# EAGLE board basic (EAGLE 9.5.2)
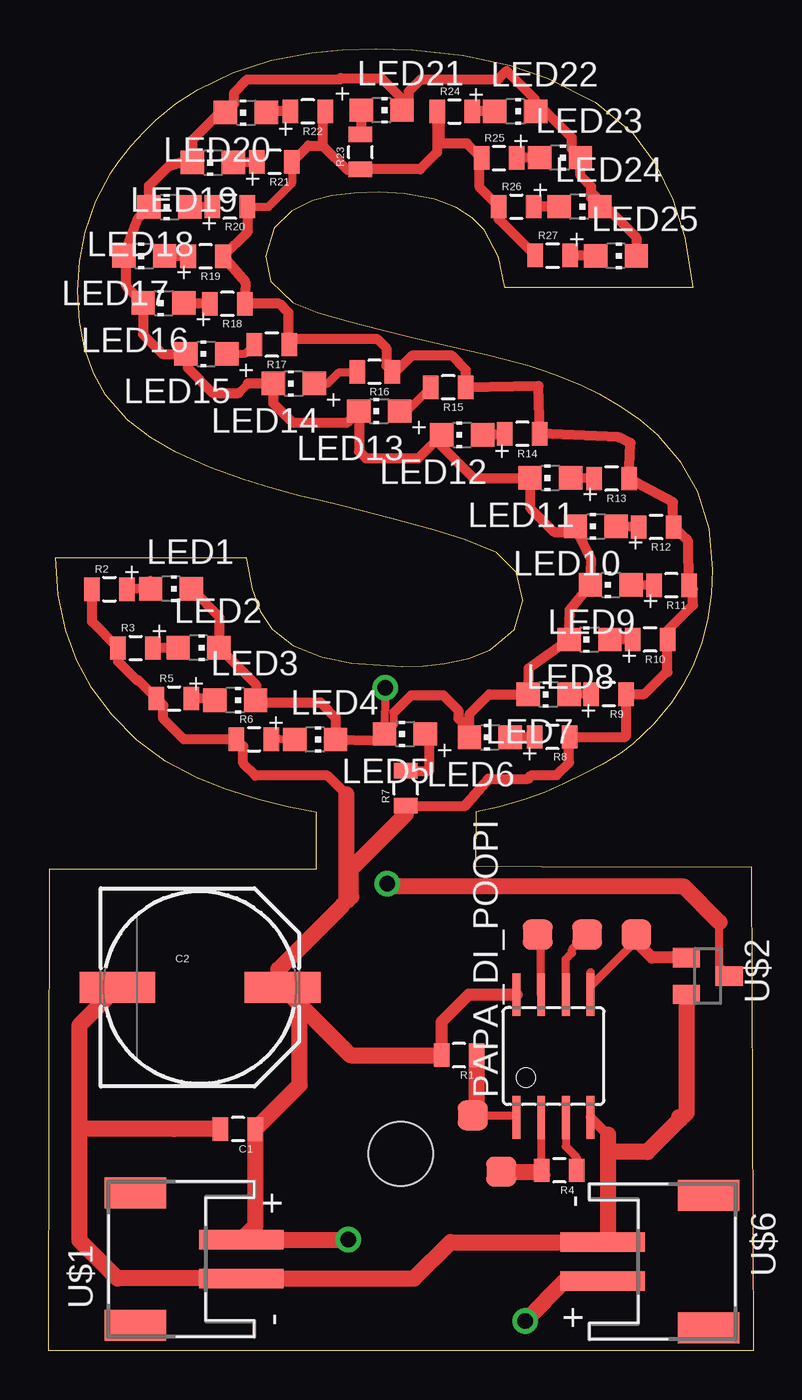
[diagram p0: board, top side]
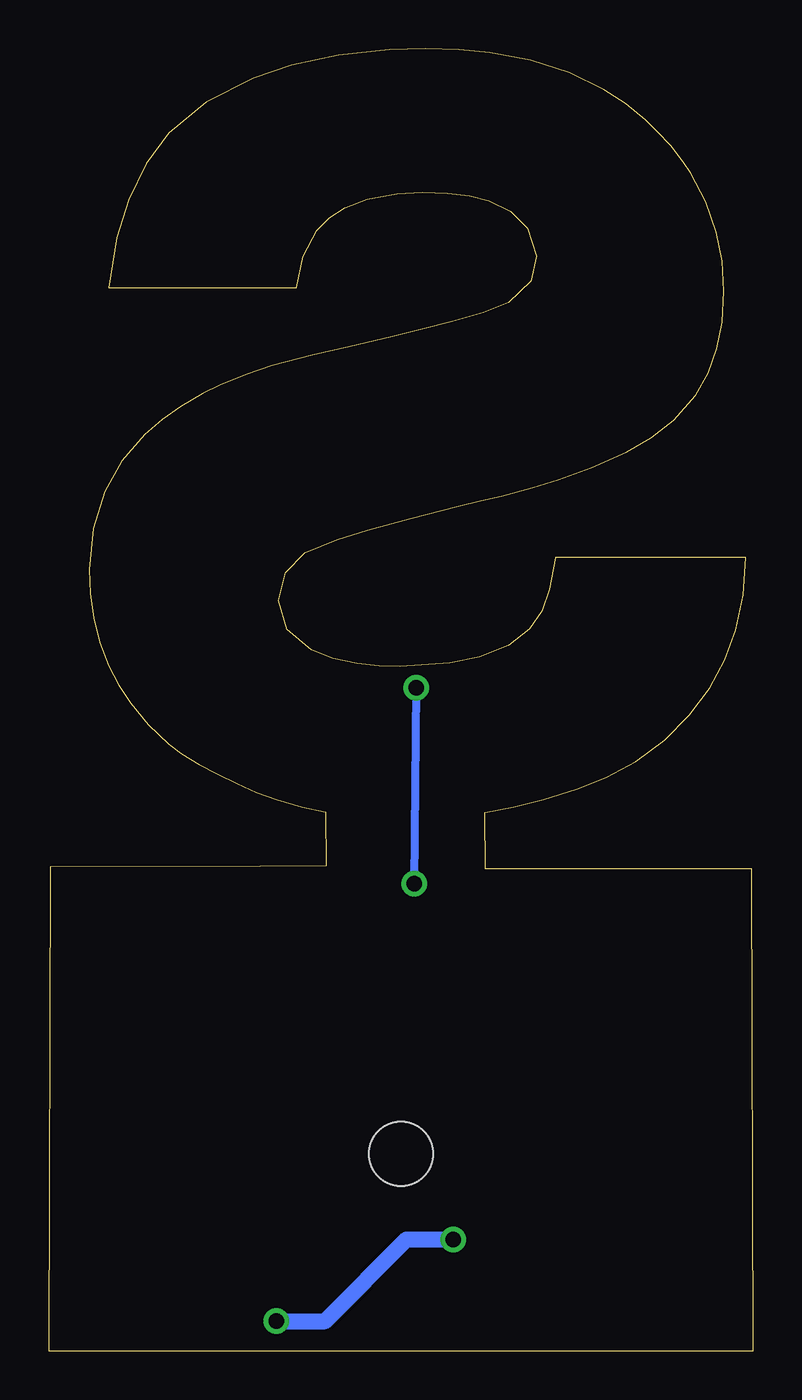
[diagram p1: board, bottom side, seen from below]

Size 36.27 x 67.02 mm. Coordinates in mm from the lower left corner, seen from the top.
Outline: 13.8,27.72 12.34,27.99 10.79,28.38 9.07,28.93 7.59,29.51 6.02,30.34 4.54,31.45 3.28,32.72 2.23,34.13 1.45,35.57 0.88,37.1 0.51,38.9 0.38,40.82 10.18,40.82 10.48,39.21 10.88,38.09 11.5,37.16 12.6,36.31 14.08,35.71 15.6,35.39 18.18,35.23 19.27,35.26 20.38,35.38 21.61,35.64 22.73,36.07 23.99,37.13 24.41,38.62 24.07,40.05 23.05,41.09 21.42,41.76 19.85,42.24 17.66,42.84 15.16,43.47 14.01,43.75 12.95,44.01 11.37,44.43 10.03,44.83 8.33,45.45 6.53,46.26 5.25,47 4.07,47.9 2.95,49.18 2.31,50.31 1.86,51.58 1.59,52.95 1.5,54.55 1.59,56.08 1.88,57.58 2.43,59.13 3.21,60.61 3.59,61.19 4.24,62.02 4.92,62.76 5.52,63.34 6.55,64.19 7.68,64.92 9.47,65.78 11.46,66.42 13.53,66.81 15.15,66.97 16.85,67.02 18.7,66.97 21.34,66.69 23.75,66.17 25.71,65.51 28.15,64.26 30.07,62.66 31.24,61.1 32.14,59.26 32.75,57.29 33.16,54.72 23.5,54.72 23.16,56.32 22.44,57.67 21.8,58.31 21,58.83 19.88,59.27 18.34,59.57 17.01,59.63 15.74,59.59 14.6,59.45 13.58,59.19 12.5,58.65 11.61,57.77 11.16,56.34 11.44,55.06 12.59,53.94 13.87,53.44 15.51,52.96 17.01,52.57 18.67,52.17 20.76,51.69 22.67,51.26 24.75,50.7 26.09,50.24 27.43,49.69 28.33,49.25 29.46,48.6 30.43,47.93 31.33,47.16 32.5,45.79 33.38,44.22 33.98,42.31 34.18,40.21 34.12,38.97 33.95,37.73 33.63,36.45 33.16,35.24 32.66,34.26 32.05,33.34 31.14,32.25 30.08,31.24 29.45,30.76 28.5,30.17 27.57,29.68 26.56,29.19 25.54,28.74 24.53,28.37 23.21,28 22,27.72 21.98,24.96 25.37,24.93 36.18,24.91 36.27,0 0,0 0.06,24.81 13.78,24.81 13.8,27.72
Copper layers (1*16): Top 0.035mm / dielectric 1.5mm / Bottom 0.035mm
Design rules "default": minimum track width 16mil, minimum drill 0.8mm, track to track 0.8mm, track to pad 0.8mm, pad to pad 0.8mm, via to via 0.8mm, smd to smd 0mil, copper to edge 1mil, drill to drill 1mil, minimum pad ring 10mil, minimum via ring 10mil, stop-mask expansion 1mil, vias tented up to drill 30mil, thermal gap 10mil
Holes 3.3 mm at 18.13,10.14

## Footprints (pad centres in the part's own frame; a part is rotated, then mirrored left to right if it is on the bottom)
0805 = smd 0.8 x 1.2: 1 -0.9,0; 2 0.9,0
CAP_RADIAL_CAN_10MM = smd 3.9 x 1.6: + 4.25,0; - -4.25,0
TESTPOINT-1 = smd 1.524 x 1.524: 1 0,0
CHIP-LED0805 = smd 1.2 x 1.2: A 0,-1.05; C 0,1.05
SOIC8 = smd 0.4 x 2.2: 1 -1.905,-3.154; 2 -0.635,-3.154; 3 0.635,-3.154; 4 1.905,-3.154; 5 1.905,3.154; 6 0.635,3.154; 7 -0.635,3.154; 8 -1.905,3.154
JST-PH-2-SMT-RA = smd 1 x 4.35: 1 1,-3.825; 2 -1,-3.825 | smd 1.6 x 3.15: NC1 -3.4,1.625; NC2 3.4,1.625
SOT23 = smd 1 x 1.4: 1 -0.95,-1.1; 2 0.95,-1.1; 3 0,1.1
TESTPOINT-3 = smd 1.524 x 1.524: 1 0,0; 2 2.54,0; 3 5.08,0

## Placement (x,y rotation side)
C1  0.1uF  [0805]  9.75,11.42 180 top
C2  47uF  [CAP_RADIAL_CAN_10MM]  7.79,18.71 0 top
CAP_SENSOR_1  HEADER-1-TESTPOINT  [TESTPOINT-1]  21.84,12.13 0 top
CAP_SENSOR_2  HEADER-1-TESTPOINT  [TESTPOINT-1]  23.3,9.23 0 top
LED1  [CHIP-LED0805]  6.3,39.22 270 top
LED2  [CHIP-LED0805]  7.72,36.19 270 top
LED3  [CHIP-LED0805]  9.61,33.49 270 top
LED4  [CHIP-LED0805]  13.72,31.47 270 top
LED5  [CHIP-LED0805]  18.34,31.75 90 top
LED6  [CHIP-LED0805]  22.72,31.58 90 top
LED7  [CHIP-LED0805]  25.74,33.79 90 top
LED8  [CHIP-LED0805]  27.84,36.61 90 top
LED9  [CHIP-LED0805]  28.94,39.43 90 top
LED10  [CHIP-LED0805]  28.17,42.44 90 top
LED11  [CHIP-LED0805]  25.83,44.93 90 top
LED12  [CHIP-LED0805]  21.29,47.15 90 top
LED13  [CHIP-LED0805]  17.02,48.37 90 top
LED14  [CHIP-LED0805]  12.62,49.79 90 top
LED15  [CHIP-LED0805]  8.12,51.31 90 top
LED16  [CHIP-LED0805]  5.92,53.93 90 top
LED17  [CHIP-LED0805]  4.92,56.35 90 top
LED18  [CHIP-LED0805]  6.22,58.87 90 top
LED19  [CHIP-LED0805]  8.46,61.16 90 top
LED20  [CHIP-LED0805]  10.16,63.73 90 top
LED21  [CHIP-LED0805]  17.14,63.85 270 top
LED22  [CHIP-LED0805]  24.02,63.79 270 top
LED23  [CHIP-LED0805]  26.33,61.41 270 top
LED24  [CHIP-LED0805]  27.33,58.89 270 top
LED25  [CHIP-LED0805]  29.21,56.35 270 top
PAPA_DI_POOPI  MICRO_ATTINY85-20SU  [SOIC8]  25.99,15.18 0 top
R1  10k  [0805]  21.13,15.22 180 top
R2  220  [0805]  3.13,39.2 0 top
R3  220  [0805]  4.48,36.18 0 top
R4  1M  [0805]  26.29,9.3 180 top
R5  220  [0805]  6.46,33.58 0 top
R6  220  [0805]  10.58,31.48 0 top
R7  220  [0805]  18.39,28.95 90 top
R8  220  [0805]  25.93,31.6 180 top
R9  220  [0805]  28.84,33.8 180 top
R10  220  [0805]  30.96,36.61 180 top
R11  220  [0805]  32.06,39.4 180 top
R12  220  [0805]  31.27,42.4 180 top
R13  220  [0805]  28.98,44.9 180 top
R14  220  [0805]  24.39,47.2 180 top
R15  220  [0805]  20.57,49.59 180 top
R16  220  [0805]  16.78,50.39 180 top
R17  220  [0805]  11.49,51.79 180 top
R18  220  [0805]  9.2,53.89 180 top
R19  220  [0805]  8.09,56.33 180 top
R20  220  [0805]  9.33,58.88 180 top
R21  220  [0805]  11.63,61.19 180 top
R22  220  [0805]  13.34,63.79 180 top
R23  220  [0805]  16.05,61.7 90 top
R24  220  [0805]  20.9,63.79 0 top
R25  220  [0805]  23.19,61.39 0 top
R26  220  [0805]  24.08,58.89 0 top
R27  220  [0805]  25.95,56.37 0 top
U$1  CONN_BATTERY-LIPO-HORIZ  [JST-PH-2-SMT-RA]  6.09,4.73 90 top
U$2  COMPONENT_TRANSISTOR_NPN  [SOT23]  33.93,19.3 270 top
U$5  HEADER-3-TESTPOINT  [TESTPOINT-3]  25.18,21.43 0 top
U$6  CONN_BATTERY-LIPO-HORIZ  [JST-PH-2-SMT-RA]  32.35,4.6 270 top

## Library data of the parts
C1 C2 CAP_SENSOR_1 CAP_SENSOR_2 LED1-LED25 PAPA_DI_POOPI R1-R27 U$1 U$5 U$6 = homemade-hardware
U$2 = homemade-hardware; PN: BSS806NH6327XTSA1

## Nets
COLLECTOR: LED1.C LED2.C LED3.C LED4.C LED5.C LED6.C LED7.C LED8.C LED9.C LED10.C LED11.C LED12.C LED13.C LED14.C LED15.C LED16.C LED17.C LED18.C LED19.C LED20.C LED21.C LED22.C LED23.C LED24.C LED25.C U$2.3
GND: C1.2 C2.- PAPA_DI_POOPI.4 U$1.2 U$2.2 U$6.2
N$1: CAP_SENSOR_1.1 PAPA_DI_POOPI.1 R1.1
N$2: LED3.A R5.2
N$3: PAPA_DI_POOPI.5 U$2.1 U$5.3
N$4: PAPA_DI_POOPI.7 U$5.1
N$5: LED1.A R2.2
N$7: LED2.A R3.2
N$8: PAPA_DI_POOPI.3 R4.1
N$9: CAP_SENSOR_2.1 PAPA_DI_POOPI.2 R4.2
N$11: PAPA_DI_POOPI.6 U$5.2
N$17: LED4.A R6.2
N$19: LED7.A R9.2
N$20: LED5.A R7.2
N$23: LED6.A R8.2
N$24: LED8.A R10.2
N$27: LED9.A R11.2
N$30: LED10.A R12.2
N$33: LED11.A R13.2
N$36: LED12.A R14.2
N$39: LED13.A R15.2
N$42: LED14.A R16.2
N$45: LED15.A R17.2
N$48: LED16.A R18.2
N$51: LED17.A R19.2
N$54: LED18.A R20.2
N$57: LED19.A R21.2
N$60: LED20.A R22.2
N$63: LED21.A R23.2
N$66: LED22.A R24.2
N$69: LED23.A R25.2
N$72: LED24.A R26.2
N$75: LED25.A R27.2
POWER: C1.1 C2.+ PAPA_DI_POOPI.8 R1.2 R2.1 R3.1 R5.1 R6.1 R7.1 R8.1 R9.1 R10.1 R11.1 R12.1 R13.1 R14.1 R15.1 R16.1 R17.1 R18.1 R19.1 R20.1 R21.1 R22.1 R23.1 R24.1 R25.1 R26.1 R27.1 U$1.1 U$6.1

## Tracks (layer width: path | path; a pad name or v marks a point on that pad's centre or on a via)
COLLECTOR  (via drill 0.8)
  Top 0.406: 17.79,32.86 17.79,32.24 LED5.C v17.33,34.14 | 24.29,33.38 LED7.C | 9.79,49.3 10.27,49.79 | 7.07,50.89 LED15.C 7.17,51.21 | LED16.C | LED3.C 10.67,33.48 10.78,33.37 | U$2.3 34.53,19.79 34.53,22.06 | 17.41,23.89 v17.43,24.04
  Top 0.508: 10.86,33.69 LED3.C | LED5.C 16.74,31.42 LED4.C 14.78,32.58 13.99,33.37 10.78,33.37 | 17.79,32.86 18.68,33.75 20.31,33.75 21.09,32.96 21.09,32.55 21.67,31.98 LED6.C 21.67,32.77 22.68,33.79 LED7.C 24.73,35.13 LED8.C 26.83,38.14 LED9.C 27.93,40.74 27.26,42.15 | 27.26,42.15 LED10.C | 10.27,49.79 LED14.C 11.57,48.77 12.56,47.78 15.39,47.78 LED13.C 15.97,46.3 16.33,45.94 19.03,45.94 LED12.C 19.95,46.85 21.87,44.93 LED11.C 24.78,43.39 26.02,42.15 27.26,42.15 | 7.17,51.21 7.17,50.59 8.46,49.3 9.79,49.3 | LED16.C 4.87,52.31 5.87,51.31 LED15.C | LED16.C 3.97,54.83 3.97,56.25 LED17.C 3.87,56.42 4.59,58.29 LED18.C 5.17,59.97 6.16,60.96 6.81,61.16 LED19.C 7.41,62.33 8.81,63.73 LED20.C | LED1.C 8.77,37.81 LED2.C 10.67,34.29 10.67,33.48 | LED24.C 27.94,59.33 27.94,59.64 | 27.94,59.64 27.94,59.92 27.38,60.48 LED23.C 26.94,61.85 26.94,62.44 25.59,63.79 LED22.C 25.03,63.84 25.03,64.43 23.57,65.88 23.14,65.45 19.17,65.45 18.55,64.82 18.55,64.2 LED21.C | 27.94,59.64 30.26,57.32 LED25.C | LED20.C 9.16,63.77 | LED21.C 17.83,64.21 | LED20.C 9.56,64.17 9.56,64.76 10.23,65.44 14.99,65.44 15.05,65.5 17.13,65.5 18.19,64.44 LED21.C
  Top 0.813: 34.53,22.06 32.71,23.89 17.41,23.89
  Bottom 0.406: v17.43,24.04 v17.33,34.14
GND
  Top 0.508: PAPA_DI_POOPI.4 28.8,11.12
  Top 0.813: 32.45,12.02 32.53,11.94 | 32.53,11.94 32.83,12.24 U$2.2 | C2.- 1.59,16.75 1.59,11.44 | 1.59,11.44 1.59,5.68 3.54,3.73 U$1.2 18.82,3.73 20.69,5.6 U$6.2 28.8,5.87 28.8,10.24 | 28.8,10.24 28.8,11.12 | 32.53,11.94 30.83,10.24 28.8,10.24 | C1.2 6.46,11.42 6.44,11.43 1.59,11.43 1.59,11.44
N$1
  Top 0.406: CAP_SENSOR_1.1 23.98,12.13 PAPA_DI_POOPI.1
  Top 0.813: CAP_SENSOR_1.1 22.03,12.32 R1.1
N$2
  Top 0.406: R5.2 7.36,33.36 | LED3.A 8.47,33.58
  Top 0.508: 8.47,33.58 R5.2
N$3
  Top 0.406: 27.9,19.5 PAPA_DI_POOPI.5 27.9,18.77 30.26,21.14 | 30.26,21.05 30.26,21.14 | 30.26,21.14 U$5.3
  Top 0.61: U$2.1 31.06,20.25 30.26,21.05
N$4
  Top 0.406: 25.33,18.36 PAPA_DI_POOPI.7 25.36,21.25 U$5.1
N$5
  Top 0.406: 5.25,39.68 LED1.A
  Top 0.508: LED1.A 4.04,39.21 R2.2
N$7
  Top 0.406: 6.27,36.19 LED2.A
  Top 0.508: R3.2 LED2.A
N$8
  Top 0.406: PAPA_DI_POOPI.3 26.63,10.52 27.19,9.96 R4.1
N$9
  Top 0.406: PAPA_DI_POOPI.2 25.36,9.33 R4.2 25.63,9.06
  Top 0.813: CAP_SENSOR_2.1 25.25,9.23 25.36,9.33
N$11
  Top 0.406: PAPA_DI_POOPI.6 26.63,20.15 26.95,20.47 26.95,20.65 U$5.2
N$17
  Top 0.406: R6.2 LED4.A
N$19
  Top 0.508: LED7.A R9.2
N$20
  Top 0.508: LED5.A 19.59,31.54 19.59,29.85 R7.2
N$23
  Top 0.406: 24.14,31.22 LED6.A
  Top 0.508: R8.2 25.02,31.58 LED6.A
N$24
  Top 0.508: R10.2 LED8.A
N$27
  Top 0.508: LED9.A R11.2
N$30
  Top 0.508: LED10.A 29.24,42.42 R12.2
N$33
  Top 0.508: LED11.A 26.9,44.91 R13.2
N$36
  Top 0.508: R14.2 23.49,47.15 LED12.A
N$39
  Top 0.406: 18.45,48.37 R15.2
  Top 0.508: 18.45,48.37 LED13.A
N$42
  Top 0.406: LED14.A 14.37,49.79 14.96,50.37 15.86,50.37 R16.2
N$45
  Top 0.406: R17.2 10.11,51.31 LED15.A
N$48
  Top 0.508: R18.2 6.99,53.91 LED16.A
N$51
  Top 0.406: R19.2
  Top 0.508: R19.2 LED17.A
N$54
  Top 0.508: R20.2 8.43,58.88 LED18.A
N$57
  Top 0.508: R21.2 10.72,61.18 LED19.A
N$60
  Top 0.508: LED20.A 11.27,63.79 R22.2
N$63
  Top 0.508: R23.2 16.09,62.63 LED21.A
N$66
  Top 0.508: LED22.A R24.2
N$69
  Top 0.508: R25.2 LED23.A
N$72
  Top 0.508: LED24.A R26.2
N$75
  Top 0.508: LED25.A R27.2
POWER  (via drill 0.8)
  Top 0.406: 15.33,23.14 15.13,22.94 14.03,21.84 | 24.72,29.39 24.67,29.44 | 31.82,34.96 31.86,34.91 | R21.1 12.53,60.09 11.33,58.88 R20.1 | R22.1 14.24,63.67 | R23.1 | 22.19,61.58 22.29,61.48 R25.1
  Top 0.508: R7.1 21.43,28.04 22.63,29.44 24.67,29.44 24.86,29.63 26.15,29.63 26.79,30.26 26.79,31.55 R8.1 29.69,31.6 29.74,31.65 R9.1 | R9.1 | R9.1 29.76,33.81 30.68,33.81 31.82,34.96 | R20.1 10.23,57.58 R19.1 10.14,55 R18.1 11.88,53.89 12.33,53.44 12.33,51.85 R17.1 12.69,52.09 16.9,52.09 17.38,51.6 17.38,50.68 R16.1 17.88,50.39 18.74,51.24 20.51,51.24 20.73,51.24 21.47,50.5 R15.1 25.22,49.65 R14.1 29.35,47.03 29.96,46.73 R13.1 32.14,43.67 R12.1 32.93,41.68 R11.1 33.16,39.19 33.16,38.38 31.86,37.08 R10.1 31.86,34.91 | R27.1 23.18,58.24 R26.1 22.19,59.88 22.19,61.58 | R25.1 21.55,62.13 20.15,62.13 20.15,63.64 R24.1 20,61.68 19.13,60.81 16.07,60.81 R23.1 15.35,60.8 14.14,62.01 14.14,62.04 | 15.33,28.64 14.36,29.61 10.65,29.61 10.02,30.24 10.02,31.13 R6.1 6.97,31.48 5.91,32.54 5.91,33.23 R5.1 4.62,34.52 4.54,34.52 3.58,35.49 R3.1 2.23,37.52 R2.1 | R22.1 14.24,63.64 14.14,63.54 14.14,62.04 | R21.1 13.38,62.04 14.14,62.04
  Top 0.61: PAPA_DI_POOPI.8 21.63,18.33 20.23,16.94 R1.2
  Top 0.813: C2.+ 11.84,19.64 15.13,22.94 | 15.33,28.64 15.33,23.14 15.57,23.38 15.57,24.81 18.39,27.63 R7.1 | C2.+ 12.42,18.33 12.93,18.33 12.93,13.7 C1.1 10.65,6.46 U$1.1 | U$1.1 10.74,5.73 | C2.+ 15.54,15.22 R1.2 | U$6.1 26.59,3.6 v24.53,1.54 | U$1.1 v15.42,5.73 v15.43,5.74
  Bottom 0.813: v24.53,1.54 22.03,1.54 17.83,5.74 v15.43,5.74